# Altium PCB investigator_regulator.PcbDoc
Units mil, origin at the board's own origin, x right, y up, seen from the top; angles counter-clockwise.
Board outline 3900 x 4000 mil, 2 copper layers (Top Layer, Bottom Layer); 55 components, 35 nets, 168 pads, 1 vias.
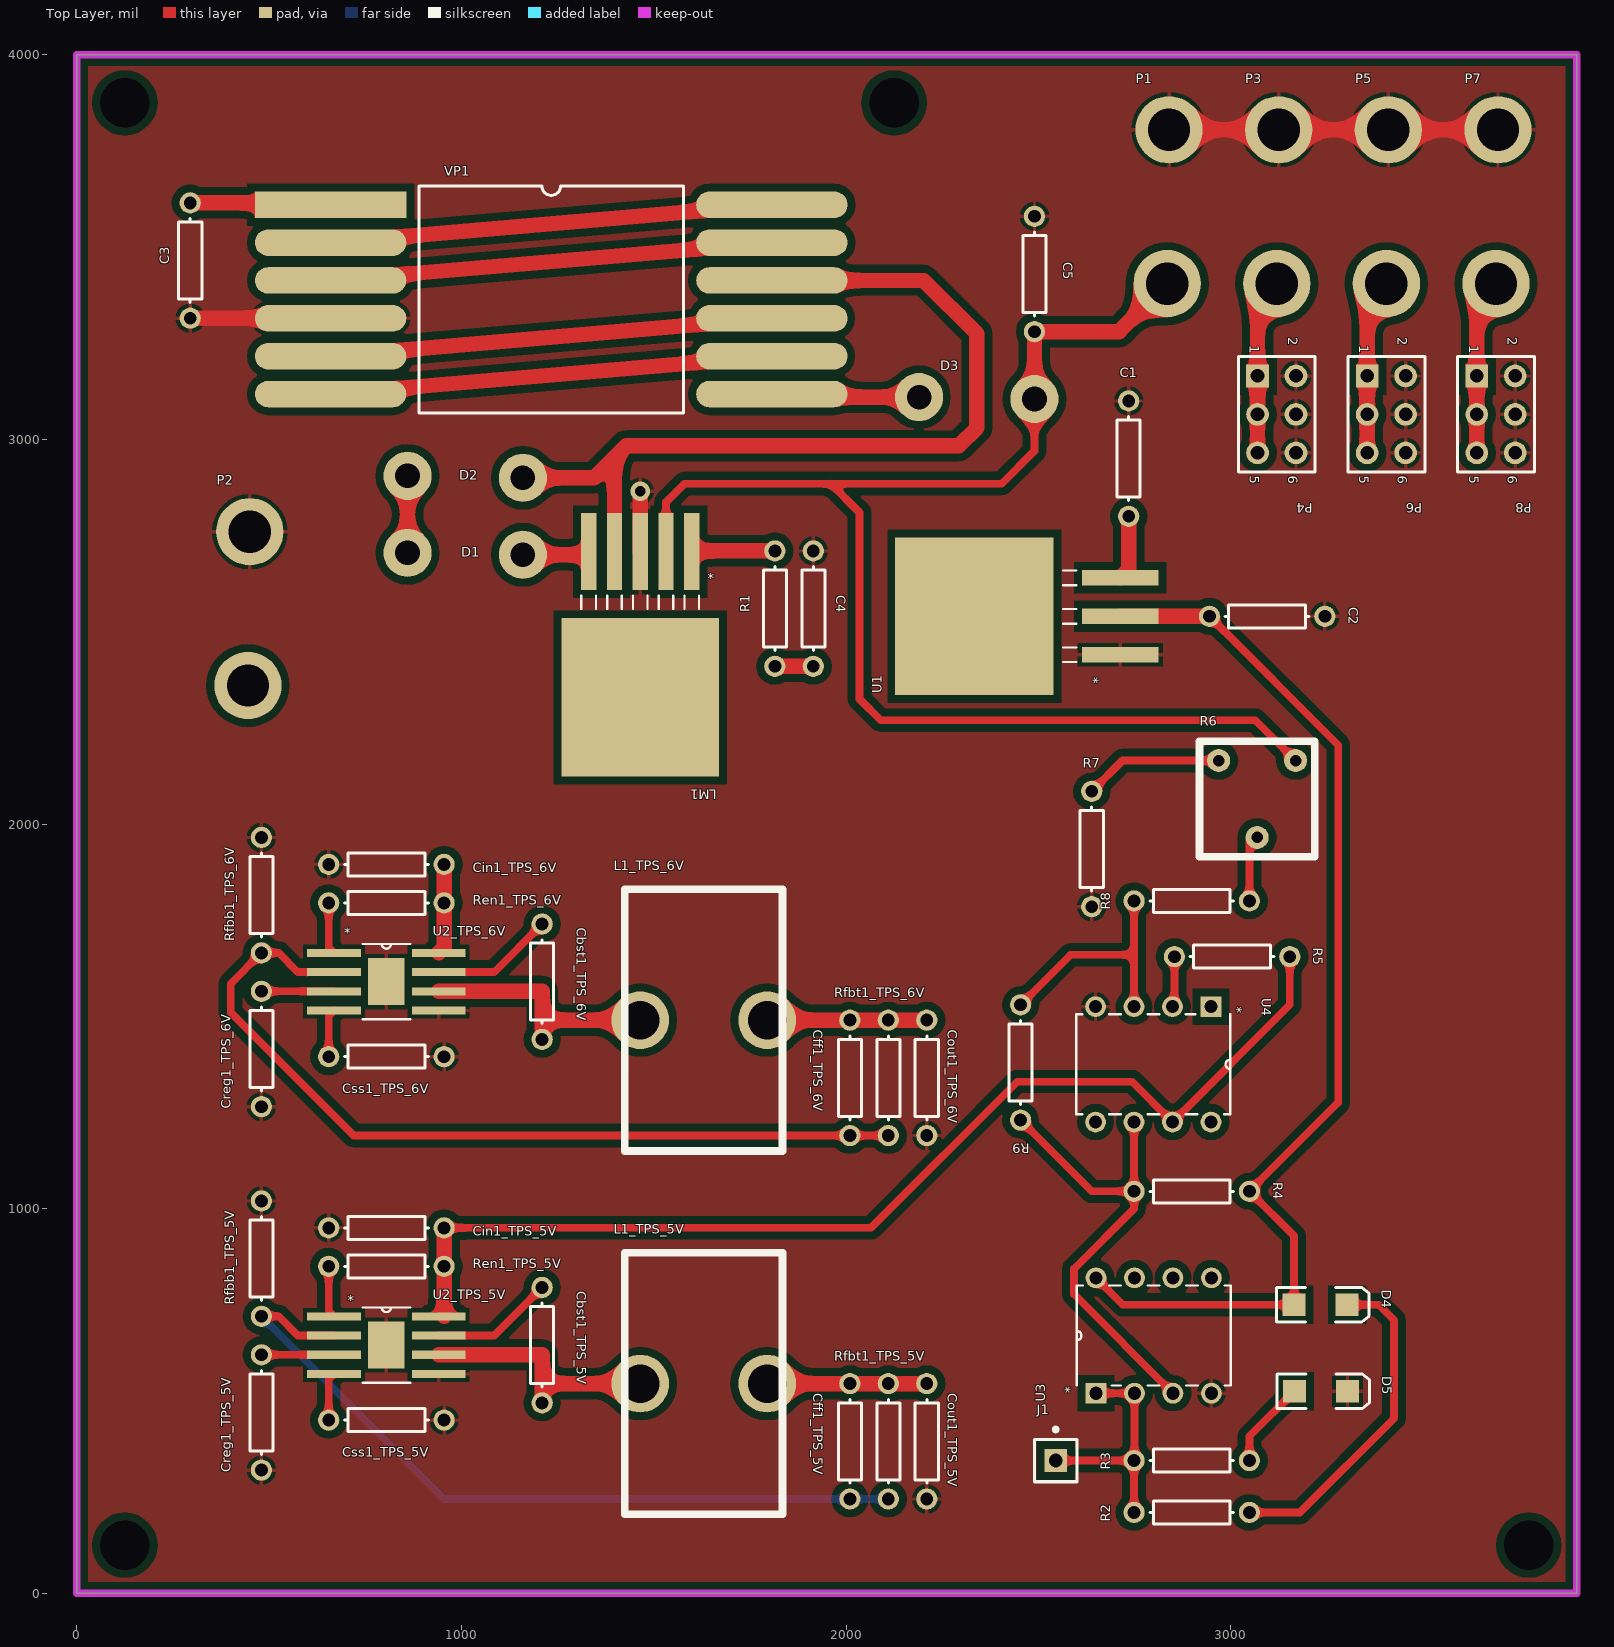
[diagram p0: Top Layer view]
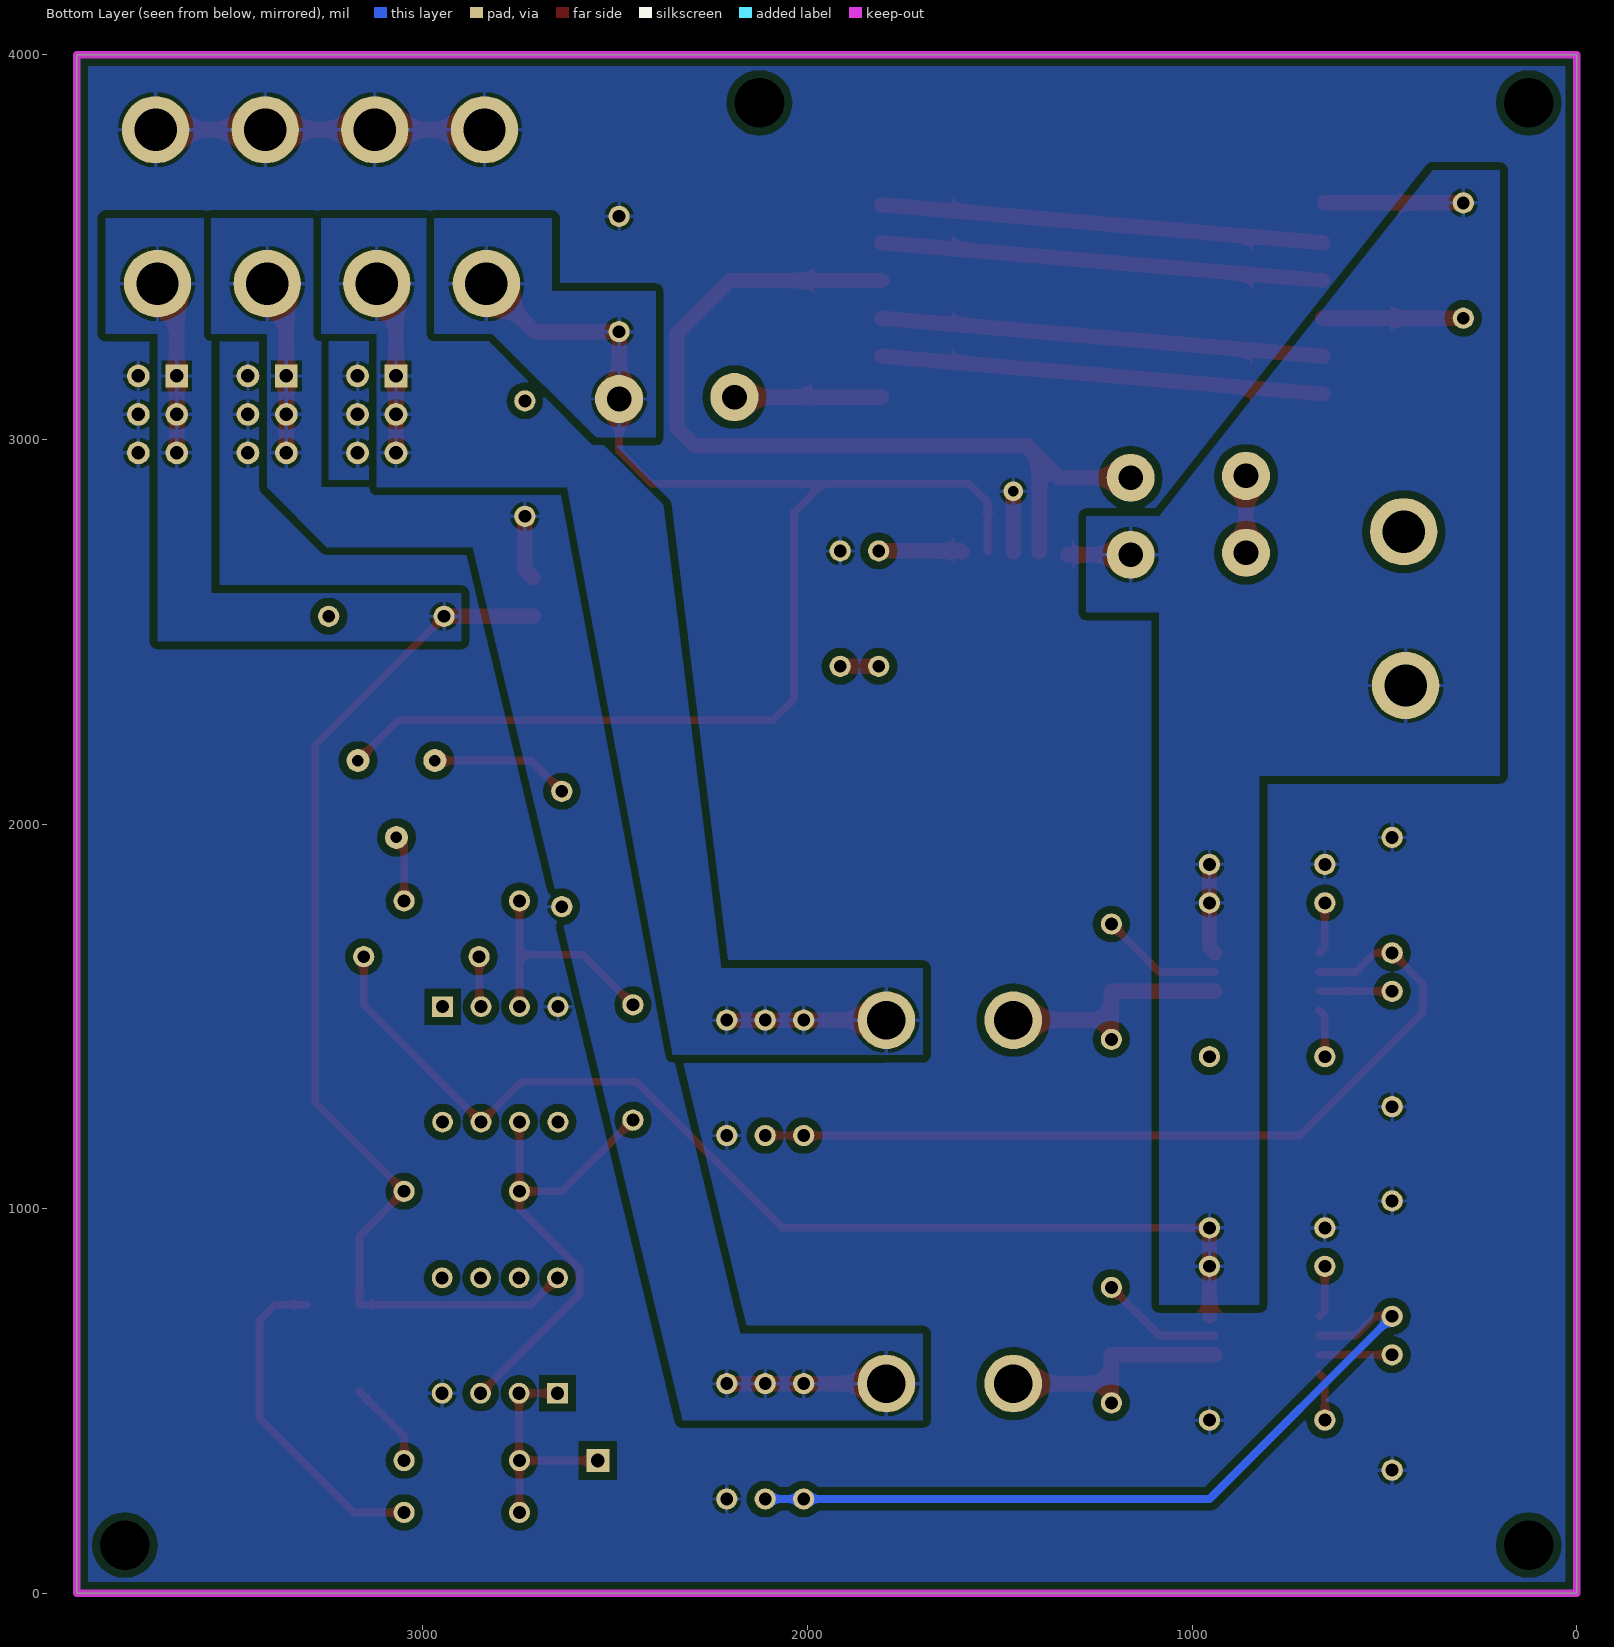
[diagram p1: Bottom Layer view, seen from below]

## Layer stack, top to bottom
Top Solder: solder mask 0.4, Solder Resist, Dk 3.5
Top Layer: signal copper 1.4
Dielectric 1: dielectric 12.6, FR-4, Dk 4.8
Bottom Layer: signal copper 1.4
Bottom Solder: solder mask 0.4, Solder Resist, Dk 3.5

## Board outline
0,0 0,4000 3900,4000 3900,0

## Design rules (kind name [scope] priority, off if disabled: settings)
Clearance SmallClearance [HasFootprint('DDA8_3P1X2P4') AND Not InPolygon] p1: gap=10
Clearance [All] p2: gap=20
PolygonConnect [All] p1: connectstyle=Relief reliefconductorwidth=10 reliefentries=4 polygonreliefangle="90 Angle" airgapwidth=10
RoomDefinition TPS_6V [InComponentClass('TPS_6V')] p1: confinementstyle=ConfineIn formatcopy=TRUE lockcomponents=FALSE outline 335,1105 2300,1105 2300,2015 335,2015
RoomDefinition TPS_5V [InComponentClass('TPS_5V')] p2: confinementstyle=ConfineIn formatcopy=TRUE lockcomponents=FALSE outline 335,160 2300,160 2300,1070 335,1070
RoomDefinition LowPowerDetector [InComponentClass('LowPowerDetector')] p3: confinementstyle=ConfineIn formatcopy=TRUE lockcomponents=FALSE outline 2335,2295 2335,125 3480,125 3480,2295
RoomDefinition LM2587_12V [InComponentClass('LM2587_12V')] p4: confinementstyle=ConfineIn formatcopy=TRUE lockcomponents=FALSE outline 165,2035 2640,2035 2640,3780 165,3780
RoutingVias [All] p1: holewidth=28 width=50 viastyle="Through Hole" minholewidth=28 minwidth=50 maxholewidth=28 maxwidth=50
SolderMaskExpansion [All] p1: expansion=4
Width [All] p1: maxlimit=50 minlimit=20 preferedwidth=20
30 further rules are at their usual default settings.

## Classes and differential pairs
component class LowPowerDetector: D4 D5 R2 R3 R4 R5 R6 R7 R8 R9 U3 U4
channel class TPS54528: TPS_5V TPS_6V
component class TPS_6V: Cbst1_TPS_6V Cff1_TPS_6V Cin1_TPS_6V Cout1_TPS_6V Creg1_TPS_6V Css1_TPS_6V L1_TPS_6V Ren1_TPS_6V Rfbb1_TPS_6V Rfbt1_TPS_6V U2_TPS_6V
component class TPS_5V: Cbst1_TPS_5V Cff1_TPS_5V Cin1_TPS_5V Cout1_TPS_5V Creg1_TPS_5V Css1_TPS_5V L1_TPS_5V Ren1_TPS_5V Rfbb1_TPS_5V Rfbt1_TPS_5V U2_TPS_5V
component class LM2587_12v: C3 C4 C5 D1 D2 D3 LM1 R1 VP1
component class investigator_regulator: C1 C2 J1 P1 P2 P3 P4 P5 P6 P7 P8 U1

## Components (designator, comment, footprint, x,y, rotation, side; value= is the part's Value field where it differs from the comment)
C1 "Cap Pol3" AXIAL-0.3 2735,2950 r90 top
C2 "Cap Pol3" AXIAL-0.3 3095,2540 r0 top
C3 "Cap Pol2" AXIAL-0.3 295,3465 r270 top
C4 "Cap" AXIAL-0.3 1915,2560 r270 top
C5 "Cap Pol2" AXIAL-0.3 2490,3430 r90 top
Cbst1_TPS_5V "C1005X5R1A104K" AXIAL-0.3 1210,645 r270 top (schematic designator Cbst1)
Cbst1_TPS_6V "C1005X5R1A104K" AXIAL-0.3 1210,1590 r270 top (schematic designator Cbst1)
Cff1_TPS_5V "GRM1555C1E5R1CA01D" AXIAL-0.3 2010,395 r270 top (schematic designator Cff1)
Cff1_TPS_6V "GRM1555C1E5R1CA01D" AXIAL-0.3 2010,1340 r270 top (schematic designator Cff1)
Cin1_TPS_5V "GRM32ER61E226KE15L" AXIAL-0.3 805,950 r180 top (schematic designator Cin1)
Cin1_TPS_6V "GRM32ER61E226KE15L" AXIAL-0.3 805,1895 r180 top (schematic designator Cin1)
Cout1_TPS_5V "GRM31CR61A476KE15L" AXIAL-0.3 2210,395 r270 top (schematic designator Cout1)
Cout1_TPS_6V "GRM31CR61A476KE15L" AXIAL-0.3 2210,1340 r270 top (schematic designator Cout1)
Creg1_TPS_5V "C1608X5R1A105K" AXIAL-0.3 480,470 r270 top (schematic designator Creg1)
Creg1_TPS_6V "C1608X5R1A105K" AXIAL-0.3 480,1415 r270 top (schematic designator Creg1)
Css1_TPS_5V "GRM155R71E822KA01D" AXIAL-0.3 805,450 r0 top (schematic designator Css1)
Css1_TPS_6V "GRM155R71E822KA01D" AXIAL-0.3 805,1395 r0 top (schematic designator Css1)
D1 "D Zener" DIODE 1160,2700 r180 top
D2 "D Schottky" DIODE 1160,2900 r180 top
D3 "D Schottky" DIODE 2190,3110 r0 top
D4 "LED2" 3.2X1.6X1.1 3233.9,750 r0 top
D5 "LED2" 3.2X1.6X1.1 3235,525 r0 top
J1 "Socket" PIN1 2545,345 r0 top
L1_TPS_5V "IHLP3232DZER3R3M11" Inductor 1465,545 r0 top (schematic designator L1)
L1_TPS_6V "IHLP3232DZER3R3M11" Inductor 1465,1490 r0 top (schematic designator L1)
LM1 "Flyback regulator" TS5B 1465,2335 r180 top
P1 "Header 2" WireHeader 2835,3405 r90 top
P2 "Header 2" WireHeader 445,2360 r90 top
P3 "Header 2" WireHeader 3120,3405 r90 top
P4 "Header 3X2" HDR2X3 3070,3165 r270 top
P5 "Header 2" WireHeader 3405,3405 r90 top
P6 "Header 3X2" HDR2X3 3355,3165 r270 top
P7 "Header 2" WireHeader 3690,3405 r90 top
P8 "Header 3X2" HDR2X3 3640,3165 r270 top
R1 "Res1" AXIAL-0.3 1815,2560 r90 top
R2 "Res3" AXIAL-0.3 2898.9,210 r180 top
R3 "Res3" AXIAL-0.3 2898.9,345 r180 top
R4 "Res3" AXIAL-0.3 2898.9,1045 r0 top
R5 "Res3" AXIAL-0.3 3003.9,1655 r0 top
R6 "RPot" RPot 3068.9,2165 r0 top
R7 "Res3" AXIAL-0.3 2638.9,1935 r90 top
R8 "Res3" AXIAL-0.3 2898.9,1800 r180 top
R9 "Res3" AXIAL-0.3 2453.9,1380 r270 top
Ren1_TPS_5V "CRCW040210K0FKED" AXIAL-0.3 805,850 r0 top (schematic designator Ren1)
Ren1_TPS_6V "CRCW040210K0FKED" AXIAL-0.3 805,1795 r0 top (schematic designator Ren1)
Rfbb1_TPS_5V "CRCW040222K1FKED" AXIAL-0.3 480,870 r90 top (schematic designator Rfbb1)
Rfbb1_TPS_6V "CRCW040222K1FKED" AXIAL-0.3 480,1815 r90 top (schematic designator Rfbb1)
Rfbt1_TPS_5V "CRCW0402121KFKED" AXIAL-0.3 2110,395 r270 top (schematic designator Rfbt1)
Rfbt1_TPS_6V "CRCW0402121KFKED" AXIAL-0.3 2110,1340 r270 top (schematic designator Rfbt1)
U1 "LM1084_KTT_3" TS3B 2340,2540 r90 top
U2_TPS_5V "TPS54528DDAR" DDA8_3P1X2P4 805,645 r0 top (schematic designator U2)
U2_TPS_6V "TPS54528DDAR" DDA8_3P1X2P4 805,1590 r0 top (schematic designator U2)
U3 "LT1632CN8" P8 2950,820 r90 top
U4 "TLV3401_P_8" P8 2648.9,1225 r270 top
VP1 "4.9 +/-20% uH per winding" TRANSFORMER_SOP12 658.11,3610 r0 top

## Footprints (in the part's own frame and the unit in brackets; to place one, negate y for a bottom-side part, rotate by r counter-clockwise, add the part's x,y. Pads: shape width x height; smd on the part's side, far side on the other; paste and mask are expansions set on the pad)
3.2X1.6X1.1 [mm] "SMT LED; 2 Flat Leads"
  rect 1.5x1.5 smd: 1(-1.75,0) 2(1.75,0)
  silkscreen extent -2.9,-1.15 3.2,1.15
AXIAL-0.3 [mm] "Axial Device, Thru-Hole; 2 Leads; 0.3 in Pin Spacing"
  round 1.4 hole 0.85: 1(-3.81,0) 2(3.81,0)
  silkscreen extent -2.77,-0.76 2.77,0.76
DDA8_3P1X2P4 [mil]
  rect 140x21 smd: 1(-136,75) 2(-136,25) 3(-136,-25) 4(-136,-75) 5(136,-75) 6(136,-25) 7(136,25) 8(136,75)
  rect 94.49x122.05 smd paste-60.52: 9(0,0)
  silkscreen extent -62,-98 62,98
DIODE [mil]
  round 125 hole 64: 1(0,0) 2(300,-5)
HDR2X3 [mm] "Connector; Header; 3x2 Position"
  rect 1.5x1.5 hole 0.9: 1(0,0)
  round 1.5 hole 0.9: 2(0,2.54) 3(2.54,0) 4(2.54,2.54) 5(5.08,0) 6(5.08,2.54)
  silkscreen extent -1.27,-1.27 6.35,3.81
Inductor [mil]
  round 150 hole 100: 1(0,0) 2(330,0)
  silkscreen extent -40,-340 370,340
P8 [mil]
  rect 54x54 / inner round 60 / far side rect 54x54 hole 34: 1(-300,300)
  round 54 / inner round 60 / far side round 54 hole 34: 2(-300,200) 3(-300,100) 4(-300,0) 5(0,0) 6(0,100) 7(0,200) 8(0,300)
  silkscreen extent -280,-50 -20,350
PIN1 [mm] "Connector; Plug"
  rect 1.5x1.5 hole 0.9: 1(0,0)
  silkscreen extent -1.4,-1.4 1.4,2.17
RPot [mil]
  round 60 hole 30: 1(100,0) 2(-100,0) 3(0,-200)
  silkscreen extent -150,-250 150,50
TRANSFORMER_SOP12 [mm]
  rect 10x1.75 smd: 1(0.048,0)
  oval 10x1.75 smd: 2(0.048,-2.5) 3(0.048,-5) 4(0.048,-7.5) 5(0.048,-10) 6(0.048,-12.5) 7(29.188,-12.5) 8(29.188,-10) 9(29.188,-7.5) 10(29.188,-5) 11(29.188,-2.5) 12(29.188,0)
  silkscreen extent 5.88,-13.75 23.35,1.25
TS3B [mil]
  rect 40x200 smd: 1(-100,-373) 2(0,-373) 3(100,-373)
  rect 410x412 smd: 4(0,6)
  silkscreen extent -119,-259 119,-224
TS5B [mil]
  rect 40x200 smd: 1(-134,-373) 2(-67,-373) 3(0,-373) 4(67,-373) 5(134,-373)
  rect 410x412 smd: 6(0,6)
  silkscreen extent -153,-259 153,-224
WireHeader [mil]
  round 175 hole 110: 1(0,0) 2(400,-5)

## Part data
C1 C2: "Polarized Capacitor (Surface Mount)"
C3 C5: "Polarized Capacitor (Axial)"
C4: "Capacitor"
Cff1_TPS_5V Cff1_TPS_6V: "GRM1555C1E5R1CA0"
Cin1_TPS_5V Cin1_TPS_6V: "GRM32ER61E226KE1"
Cout1_TPS_5V Cout1_TPS_6V: "GRM31CR61A476KE1"
Css1_TPS_5V Css1_TPS_6V: "GRM155R71E822KA0"
D1: "Zener Diode"
D2 D3: "Schottky Diode"
D4 D5: "Typical RED, GREEN, YELLOW, AMBER GaAs LED"
L1_TPS_5V L1_TPS_6V: "Unknown"
LM1: library part LM2587
P1 P2 P3 P5 P7: "Header, 2-Pin"
P4 P6 P8: "Header, 3-Pin, Dual row"
R1 R2 R3 R4 R5 R7 R8 R9: "Resistor"
R6: "Potentiometer"
U1 U4: "Imported"
U3: "45MHz, 45V/µs, Dual Rail-to-Rail Input and Output Precision Operational Amplifier"
VP1: library part VP4-0060-R

## Free pads (board coordinates)
  round 0 hole 129: 1(3775,125) 2(2125,3875) 3(125,3875) 4(125,125)

## Via types
v1: diameter 50, hole 28, Top Layer to Bottom Layer, 1 vias

## Nets (pads, with @x,y where several pads share a name; then routed paths per layer and width w, separated by ;. In a path a pad name is that pad's centre, name@x,y a point inside that pad or via, vN(x,y) a via of type N, cw(c..) or ccw(c..) an arc to the next point about the centre after c; other vN are vias at no path point)
3.3V: C2.1 D4.1 P7.1 P8.1 P8.3 P8.5 R4.2 U1.2 U3.8 | length 3309.3
  Top Layer w20: U3.8 2720,750 D4.1 3165,928.9 R4.2 3280,1276.1 3280,2205 C2.1
  Top Layer w40: U1.2 C2.1 ; P8.5 P8.3 P8.1 3640,3355 P7.1
5V: C1.1 Cff1_TPS_5V.1 Cout1_TPS_5V.1 L1_TPS_5V.2 P5.1 P6.1 P6.3 P6.5 Rfbt1_TPS_5V.1 U1.3 | length 1044.8
  Top Layer w40: L1_TPS_5V.2 Cff1_TPS_5V.1 Rfbt1_TPS_5V.1 Cout1_TPS_5V.1 ; U1.3 2735,2662 C1.1 ; P6.5 P6.3 P6.1 3355,3355 P5.1
6V: Cff1_TPS_6V.1 Cout1_TPS_6V.1 L1_TPS_6V.2 P3.1 P4.1 P4.3 P4.5 Rfbt1_TPS_6V.1 | length 875.7
  Top Layer w40: L1_TPS_6V.2 Cff1_TPS_6V.1 Rfbt1_TPS_6V.1 Cout1_TPS_6V.1 ; P4.5 P4.3 P4.1 3070,3355 P3.1
12V: C5.1 D3.2 LM1.2 P1.1 R6.1 | length 3640.1
  Top Layer w20: LM1.2 1532,2837 1580,2885 1960,2885 ; D3.2 2490,2970 2405,2885 1960,2885 ; R6.1 3063.9,2270 2090,2270 2035,2325 2035,2810 1960,2885
  Top Layer w40: D3.2 C5.1 2710,3280 P1.1
GND: C1.2 C2.2 C3.2 C4.1 C5.2 Cin1_TPS_5V.2 Cin1_TPS_6V.2 Cout1_TPS_5V.2 Cout1_TPS_6V.2 Creg1_TPS_5V.2 Creg1_TPS_6V.2 Css1_TPS_5V.2 Css1_TPS_6V.2 D5.2 LM1.3 P1.2 P2.2 P3.2 P4.2 P4.4 P4.6 P5.2 P6.2 P6.4 P6.6 P7.2 P8.2 P8.4 P8.6 R7.1 Rfbb1_TPS_5V.2 Rfbb1_TPS_6V.2 U1.1 U2_TPS_5V.5 U2_TPS_5V.9 U2_TPS_6V.5 U2_TPS_6V.9 U3.4 U4.4 VP1.4 | length 1377
  Top Layer w40: C3.2 VP1.4@660,3315 ; LM1.3 v1(1465,2865) ; P1.2 P3.2 P5.2 P7.2
LOW_POWER: R4.1 R9.2 U3.3 U4.6 | length 1247.7
  Top Layer w20: R9.2 2638.9,1045 R4.1 ; U4.6 R4.1 ; U3.3 2593,777 2593,843.61 2748.9,999.51 R4.1
LOW_POWER_BUF: J1.1 R2.2 R3.2 U3.1 U3.2 | length 613.9
  Top Layer w20: J1.1 R3.2 R2.2 ; U3.1 U3.2 R3.2@2750,345
NetC4_2: C4.2 R1.1 | length 100
  Top Layer w40: R1.1 C4.2
NetCbst1_TPS_5V_1: Cbst1_TPS_5V.1 U2_TPS_5V.7 | length 320.8
  Top Layer w20: U2_TPS_5V.7 1085,670 Cbst1_TPS_5V.1
NetCbst1_TPS_5V_2: Cbst1_TPS_5V.2 L1_TPS_5V.1 U2_TPS_5V.6 | length 649
  Top Layer w40: U2_TPS_5V.6 1210,620 1210,545 ; Cbst1_TPS_5V.2 1210,545 ; L1_TPS_5V.1 1210,545
NetCbst1_TPS_6V_1: Cbst1_TPS_6V.1 U2_TPS_6V.7 | length 320.8
  Top Layer w20: U2_TPS_6V.7 1085,1615 Cbst1_TPS_6V.1
NetCbst1_TPS_6V_2: Cbst1_TPS_6V.2 L1_TPS_6V.1 U2_TPS_6V.6 | length 649
  Top Layer w40: U2_TPS_6V.6 1210,1565 1210,1490 ; Cbst1_TPS_6V.2 1210,1490 ; L1_TPS_6V.1 1210,1490
NetCff1_TPS_5V_2: Cff1_TPS_5V.2 Rfbb1_TPS_5V.1 Rfbt1_TPS_5V.2 U2_TPS_5V.2 | length 2036.5
  Top Layer w20: Rfbb1_TPS_5V.1 525,720 575,670 U2_TPS_5V.2
  Bottom Layer w20: Rfbb1_TPS_5V.1 955,245 Cff1_TPS_5V.2 Rfbt1_TPS_5V.2
NetCff1_TPS_6V_2: Cff1_TPS_6V.2 Rfbb1_TPS_6V.1 Rfbt1_TPS_6V.2 U2_TPS_6V.2 | length 2240.4
  Top Layer w20: U2_TPS_6V.2 575,1615 525,1665 Rfbb1_TPS_6V.1 400,1585 400,1510 720,1190 Cff1_TPS_6V.2 Rfbt1_TPS_6V.2
NetCreg1_TPS_5V_1: Creg1_TPS_5V.1 U2_TPS_5V.3 | length 189
  Top Layer w20: Creg1_TPS_5V.1 U2_TPS_5V.3
NetCreg1_TPS_6V_1: Creg1_TPS_6V.1 U2_TPS_6V.3 | length 189
  Top Layer w20: Creg1_TPS_6V.1 U2_TPS_6V.3
NetCss1_TPS_5V_1: Css1_TPS_5V.1 U2_TPS_5V.4 | length 125.8
  Top Layer w20: Css1_TPS_5V.1 655,556 U2_TPS_5V.4
NetCss1_TPS_6V_1: Css1_TPS_6V.1 U2_TPS_6V.4 | length 125.8
  Top Layer w20: Css1_TPS_6V.1 655,1501 U2_TPS_6V.4
NetD1_2: D1.2 D2.2 | length 200
  Top Layer w40: D1.2 D2.2
NetD2_1: D2.1 LM1.4 VP1.10 | length 2313.4
  Top Layer w40: D2.1 1345.43,2900 1398,2952.57 ; LM1.4 1398,2952.57 ; VP1.10 2201.85,3413.15 2340,3275 2340,3030 2293,2983 1428.43,2983 1398,2952.57
NetD3_1: D3.1 VP1.7 | length 382.8
  Top Layer w40: VP1.7@1807.24,3110 D3.1
NetD4_2: D4.2 R2.1 | length 871.4
  Top Layer w20: R2.1 3180,210 3425,455 3425,710 3385,750 D4.2
NetD5_1: D5.1 R3.1 | length 228.5
  Top Layer w20: R3.1 3048.9,407.8 D5.1
NetLM1_1: LM1.1 R1.2 | length 216.8
  Top Layer w40: LM1.1 1601,2710 R1.2
NetR5_1: R5.1 U4.2 | length 125
  Top Layer w20: U4.2@2853.9,1530 R5.1
NetR6_2: R6.2 R7.2 | length 363.1
  Top Layer w20: R7.2 2718.9,2165 R6.2
NetR8_2: R8.2 R9.1 U4.3 | length 623.8
  Top Layer w20: R9.1 2583.9,1660 2748.9,1660 ; U4.3 2748.9,1660 ; R8.2 2748.9,1660
NetRen1_TPS_5V_1: Ren1_TPS_5V.1 U2_TPS_5V.1 | length 135.8
  Top Layer w20: Ren1_TPS_5V.1 655,734 U2_TPS_5V.1
NetRen1_TPS_6V_1: Ren1_TPS_6V.1 U2_TPS_6V.1 | length 135.8
  Top Layer w20: Ren1_TPS_6V.1 655,1679 U2_TPS_6V.1
NetVP1_2: VP1.2 VP1.12 | length 1151.5
  Top Layer w40: VP1.2 VP1.12
NetVP1_3: VP1.3 VP1.11 | length 1151.5
  Top Layer w40: VP1.3 VP1.11
NetVP1_5: VP1.5 VP1.9 | length 1151.5
  Top Layer w40: VP1.5 VP1.9
NetVP1_6: VP1.6 VP1.8 | length 1151.5
  Top Layer w40: VP1.6 VP1.8
VIN: C3.1 Cin1_TPS_5V.1 Cin1_TPS_6V.1 D1.1 LM1.5 P2.1 R5.2 Ren1_TPS_5V.2 Ren1_TPS_6V.2 U2_TPS_5V.8 U2_TPS_6V.8 U4.7 VP1.1 | length 3639.9
  Top Layer w20: Cin1_TPS_5V.1 2065,950 2445,1330 2743.9,1330 U4.7 3153.9,1530 R5.2
  Top Layer w40: C3.1 VP1.1@655,3615 ; U2_TPS_6V.8 955,1679 Ren1_TPS_6V.2 Cin1_TPS_6V.1 ; U2_TPS_5V.8@955,720 Ren1_TPS_5V.2 Cin1_TPS_5V.1 ; D1.1 LM1.5@1323,2700
VREF: R6.3 R8.1 | length 173.3
  Top Layer w20: R8.1 3048.9,1945 R6.3
pads on no net: LM1.6 U1.4 U3.5 U3.6 U3.7 U4.1 U4.5 U4.8

## Polygon pours and split planes (outlines as drawn)
GND on Bottom Layer "GND" (solid, pour order 20): 0,4000 3900,4000 3900,0 0,0 0,4000
VIN on Bottom Layer "Vin" (solid, pour order 16): 200,3700 200,2125 825,2125 825,750 1085,750 1085,2550 1275,2550 1275,2800 1085,2800 375,3700
3.3V on Bottom Layer "3.3V" (solid, pour order 14): 2900,2600 3550,2600 3550,3575 3825,3575 3825,3275 3690,3275 3690,2475 2900,2475 2900,2600
5V on Bottom Layer "5V" (solid, pour order 12): 3265,3575 3550,3575 3550,3275 3405,3275 3405,2875 3250,2720 2870,2720 2325,450 1700,450 1700,650 1700,675 2175,675 2350,1400 2625,2875 3120,2875 3265,2875 3265,3575
6V on Bottom Layer "6V" (solid, pour order 8): 1700,1400 1700,1625 2225,1625 2375,2830 2820,3275 2985,3275 2985,3575 3265,3575 3265,3275 3120,3275 3120,2875 2625,2875 2350,1400
12V on Bottom Layer "12V" (solid, pour order 5): 2395,3005 2395,3385 2665,3385 2665,3575 2970.39,3575 2970.39,3275 2820,3275 2550,3005
GND on Top Layer "GND" (solid, pour order 18): 0,4000 0,0 3900,0 3900,4000 5,4000

## Keep-outs
Keep-Out Layer:
  the board outline again, w20

## Text inside footprints (layer, text, board x,y; h text height)
LM1: Top Overlay "*" at 1657.5,2661 h25 r180
P4: Top Overlay "6" at 3150,2905 h25 r270; Top Overlay "5" at 3050,2905 h25 r270; Top Overlay "2" at 3150,3265 h25 r270; Top Overlay "1" at 3050,3245 h25 r270
P6: Top Overlay "6" at 3435,2905 h25 r270; Top Overlay "5" at 3335,2905 h25 r270; Top Overlay "2" at 3435,3265 h25 r270; Top Overlay "1" at 3335,3245 h25 r270
P8: Top Overlay "6" at 3720,2905 h25 r270; Top Overlay "5" at 3620,2905 h25 r270; Top Overlay "2" at 3720,3265 h25 r270; Top Overlay "1" at 3620,3245 h25 r270
U1: Top Overlay "*" at 2666,2365 h25 r90
U2_TPS_5V: Top Overlay "*" at 705,750 h25
U2_TPS_6V: Top Overlay "*" at 695,1705 h25
U3: Top Overlay "*" at 2593,520 h25 r90
U4: Top Overlay "*" at 3005.9,1525 h25 r270